# Altium PCB KickerManagerV2.PcbDoc
Units mil, origin at the board's own origin, x right, y up, seen from the top; angles counter-clockwise.
Board outline 1795 x 2325 mil, 2 copper layers (Top Layer, Bottom Layer); 32 components, 24 nets, 105 pads, 13 vias.
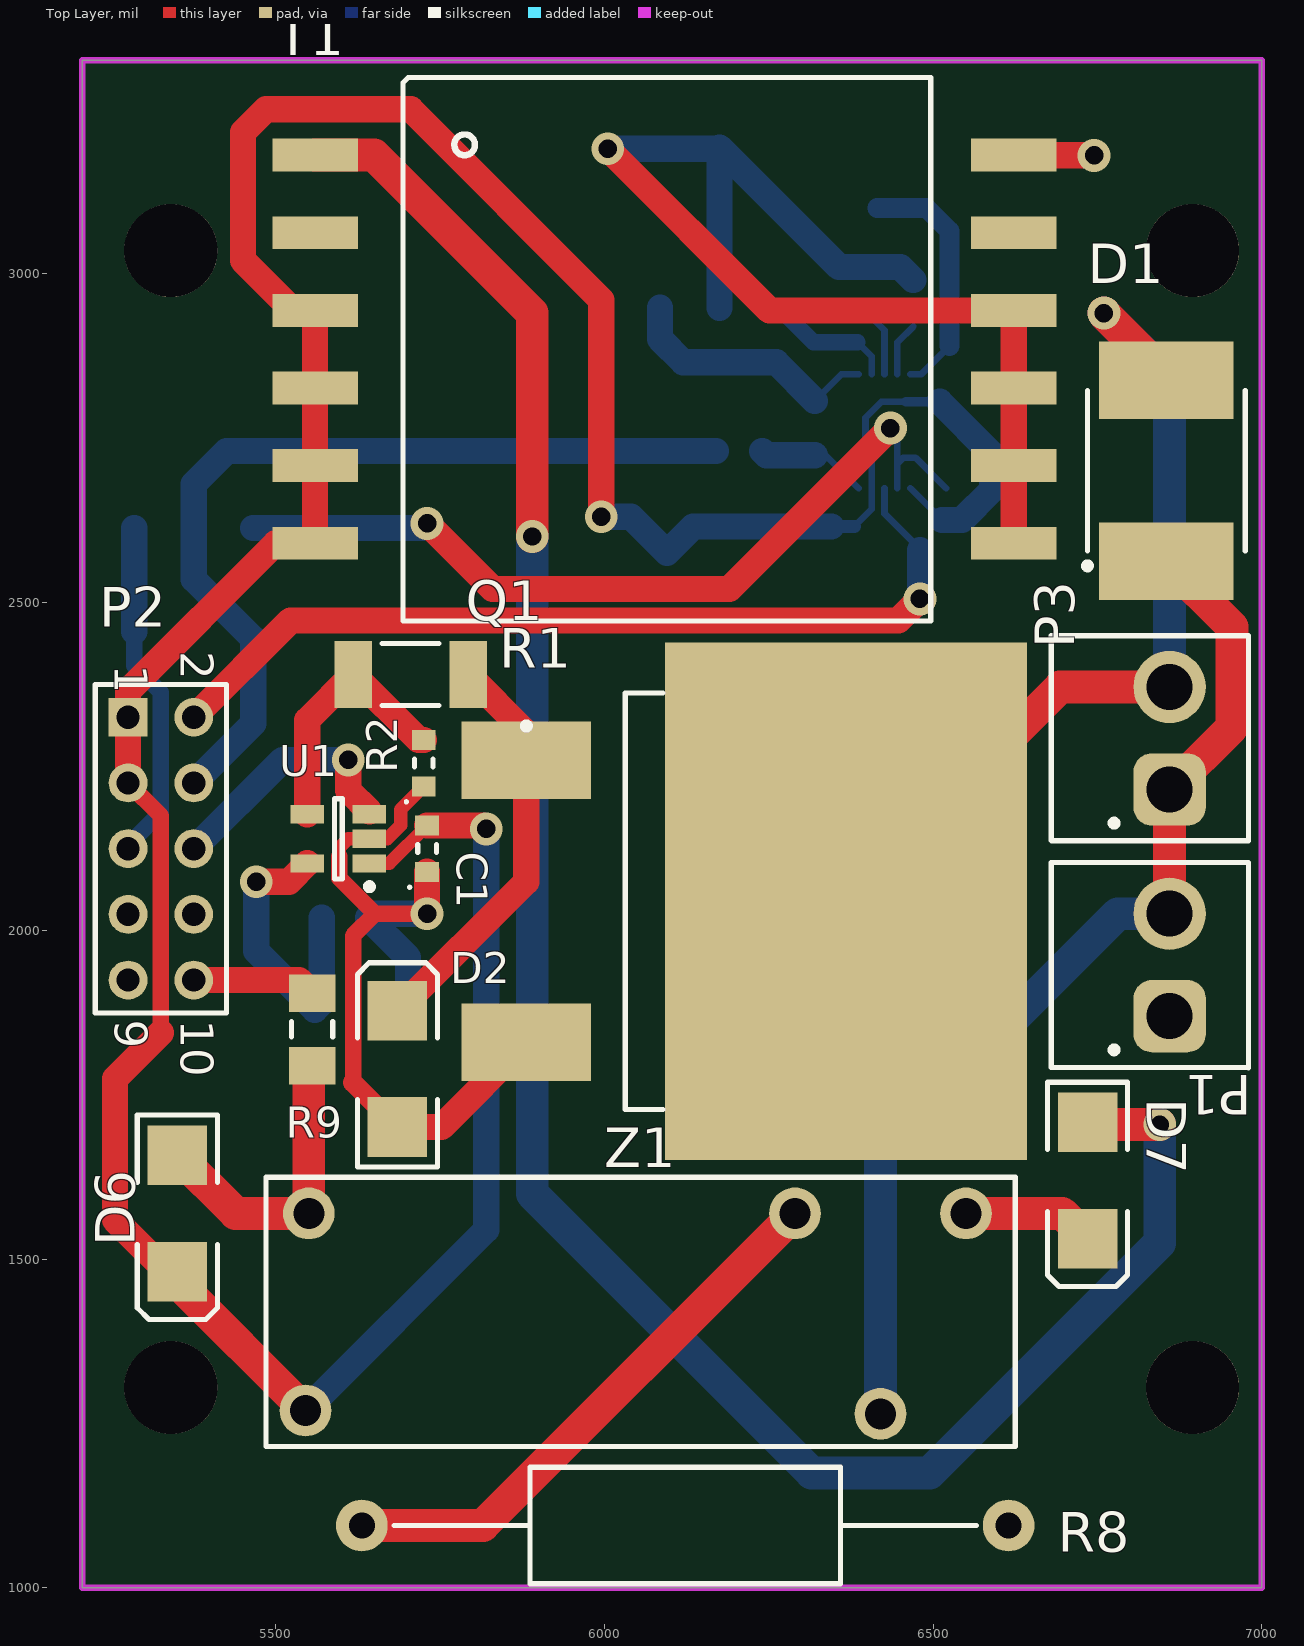
[diagram p0: Top Layer view]
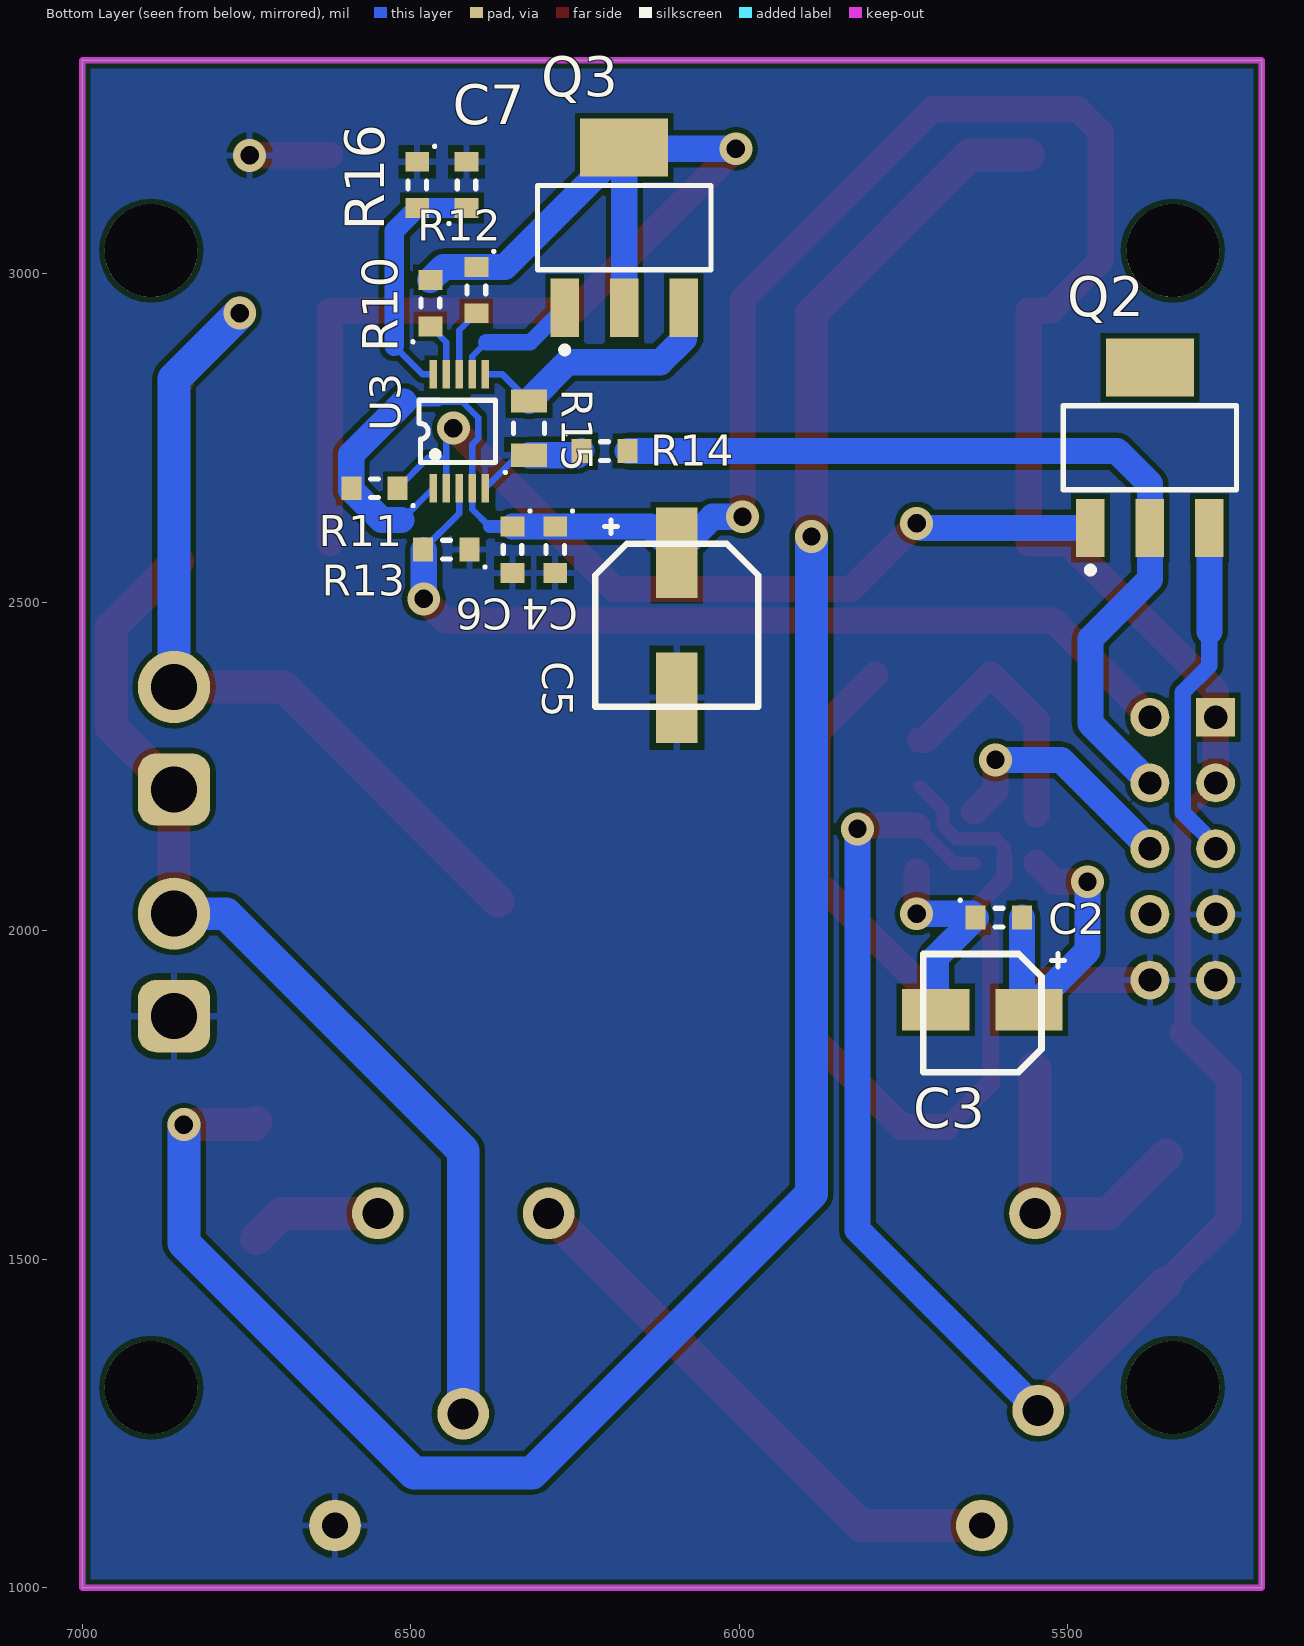
[diagram p1: Bottom Layer view, seen from below]
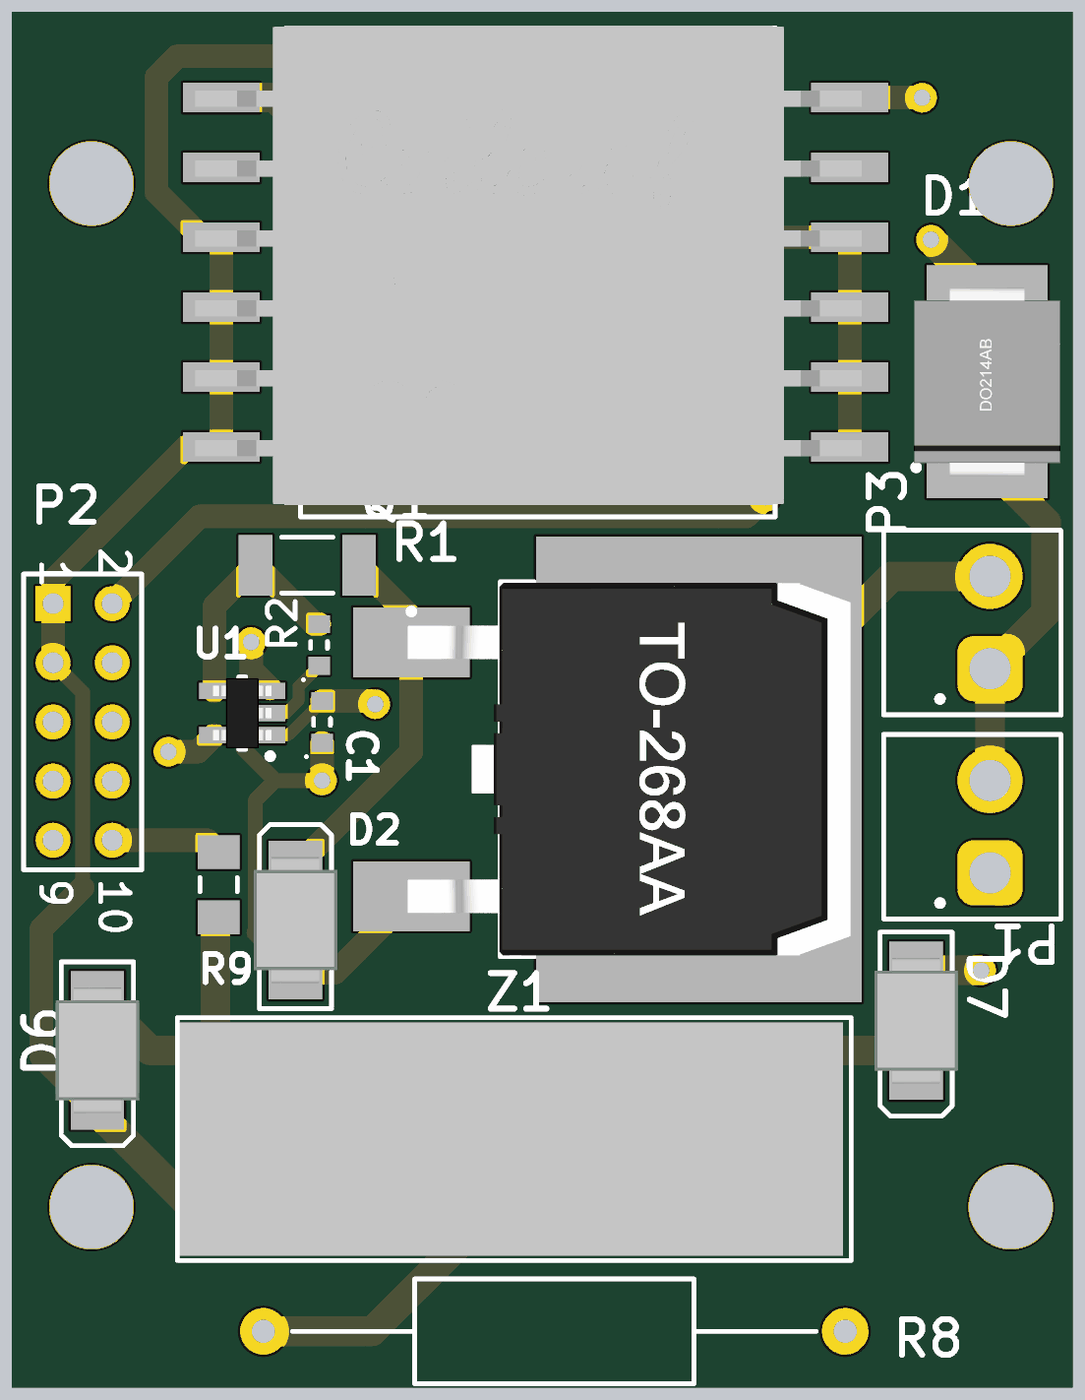
[diagram p2: 3D render of the assembled board from above, using the file's embedded part models]

## Layer stack, top to bottom
Top Solder: solder mask 0.4, Solder Resist, Dk 3.5
Top Layer: signal copper 1.4
Dielectric 1: dielectric 12.6, FR-4, Dk 4.8
Bottom Layer: signal copper 1.4
Bottom Solder: solder mask 0.4, Solder Resist, Dk 3.5

## Board outline
5205,1000 7000,1000 7000,3325 5205,3325

## Design rules (kind name [scope] priority, off if disabled: settings)
Clearance [All] p1: gap=7.87 ignorepadtopadclearanceinfootprint=FALSE
PolygonConnect [All] p1: connectstyle=Relief reliefconductorwidth=10 reliefentries=4 polygonreliefangle="90 Angle" airgapwidth=10
RoutingVias [All] p1: holewidth=28 width=50 viastyle="Through Hole" minholewidth=28 minwidth=50 maxholewidth=28 maxwidth=50
SolderMaskExpansion [All] p1: expansion=4
Width [All] p1: maxlimit=393.7 minlimit=7.87 preferedwidth=7.87
30 further rules are at their usual default settings.

## Classes and differential pairs
component class PWRBankCharger: C4 C5 C6 C7 D6 D7 Q2 Q3 R8 R9 R10 R11 R12 R13 R14 R15 R16 T1 U3 Z1
component class KickTrigger: C1 C2 C3 D2 Q1 R1 R2 U1
component class KickerManager: D1 P1 P2 P3

## Components (designator, comment, footprint, x,y, rotation, side; value= is the part's Value field where it differs from the comment)
C1 "CL10B104KB8SFNC" 0603 5730,2125 r90 top
C2 "CL10B104KB8SFNC" 0603 5605,2020 r180 bottom
C3 "865230340001" "CAP 4.3x4.3mm" 5630,1880 r180 bottom
C4 "865230340001" 0603 6280,2580 r270 bottom
C5 "865080545010" "CAP 6.6x6.6mm" 6095,2465 r90 bottom
C6 "865080545010" 0603 6345,2580 r270 bottom
C7 "CL10B101KB8NNNC" 0603 6415,3135 r90 bottom
D1 "S10M-TP" HSMC 6855,2700 r90 top
D2 "15V, 3W" SMB 5685,1790 r90 top
D6 "MURS160-13-F" SMB 5350,1570 r270 top
D7 "MURS160-E3/5BT" SMB 6735,1620 r270 top
P1 "Header 2" "0.156mil 2pin header" 6860,1870 r90 top
P2 "Header 5X2" HDR2X5 5275,2325 r270 top
P3 "Header 2" "0.156mil 2pin header" 6860,2215 r90 top
Q1 "IXFT94N30P3" TO-268 6200,2045 r0 top
Q2 "FQT5P10TF" SOT-223 5375,2735 r180 bottom
Q3 "PHT6NQ10T,135" SOT-223 6175,3070 r180 bottom
R1 "RMCP2010FT10R0" 2010 5705,2390 r0 top
R2 "RC0603JR-0710KL" 0603 5725,2255 r90 top
R8 "RWM04103901JR15E1" RWM4x10 6615,1095 r180 top
R9 "CRCW1206143RFKEA" 1206 5555,1850 r90 top
R10 "RC0603FR-0760K4L" 0603 6470,2955 r90 bottom
R11 "RC0603JR-07100KL" 0603 6555,2673.39 r0 bottom
R12 "RC0603JR-0743KL" 0603 6400,2975 r270 bottom
R13 "RC0603JR-07100KL" 0603 6445.75,2580 r0 bottom
R14 "RC0603JR-071KL" 0603 6205,2730 r180 bottom
R15 "RL1220T-R012-J" 0805 6320,2765 r90 bottom
R16 "RC0603FR-072K49L" 0603 6490,3135 r270 bottom
T1 "DA2034-al" da2034 6095,2885 r270 top
U1 "TPS2819DBVR" SOT-23-5 5595,2140 r180 top
U3 "LT3750EMS#PBF" MSOP-10 6430,2760 r180 bottom
Z1 "G6RL-1 DC12" G6RL 5155,1325 r180 top

## Footprints (in the part's own frame and the unit in brackets; to place one, negate y for a bottom-side part, rotate by r counter-clockwise, add the part's x,y. Pads: shape width x height; smd on the part's side, far side on the other; paste and mask are expansions set on the pad)
"0.156mil 2pin header" [mil]
  rrect50% 110x110 hole 70: 1(0,0)
  round 110 hole 70: 2(156,0)
  silkscreen extent -78,-120 234,180, body extent -78,-120 234,181, height 425
0603 [mm] "Chip 2-Leads, Body 1,60x0,80mm, IPC Medium Density"
  rect 0.77x0.92 smd: 1(-0.895,0) 2(0.895,0)
  silkscreen extent -1.54,-0.36 0.15,0.72, body extent -0.8,-0.4 0.8,0.4, height 1
0805 [mm] "Chip Capacitor, 2-Leads, Body 2,00x1,25mm, IPC Medium Density"
  rect 0.9x1.4 smd: 1(-1.05,0) 2(1.05,0)
  silkscreen extent -1.76,-0.6 0.2,0.96, body extent -1,-0.63 1,0.63, height 0.8
1206 [mm] "Chip Resistor, 2-Leads, Body 3,20x1,58mm, IPC Medium Density"
  rect 1.45x1.8 smd: 1(-1.4,0) 2(1.4,0)
  silkscreen extent -0.3,-0.8 0.3,0.8, body extent -1.7,-0.89 1.7,0.89, height 0.85
2010 [mm] "Chip Resistor, 2-Leads, Body 5,00x2,45mm, IPC Medium Density"
  rect 1.45x2.6 smd: 1(-2.225,0) 2(2.225,0)
  silkscreen extent -1.1,-1.2 1.1,1.2, body extent -2.6,-1.3 2.6,1.3, height 0.6
"CAP 4.3x4.3mm" [mm] "Chip"
  rect 2.6x1.6 smd: 1(1.8,0) 2(-1.8,0)
  silkscreen extent -2.29,-2.41 3.18,2.16, body extent -2.29,-2.28 2.31,2.02, height 3.91
"CAP 6.6x6.6mm" [mm] "Chip"
  rect 3.5x1.6 smd: 1(2.8,0) 2(-2.8,0)
  silkscreen extent -3.15,-3.15 4.06,3.15, body extent -3.15,-3.15 3.15,3.15, height 7.7
da2034 [mm] "Coilcraft Da2034-al"
  rect 1.27x3.3 smd: 1(-7.5,-13.6) 2(-4.5,-13.6) 3(-1.5,-13.6) 4(1.5,-13.6) 5(4.5,-13.6) 6(7.5,-13.6) 7(7.5,13.4) 8(4.5,13.4) 9(1.5,13.4) 10(-1.5,13.4) 11(-4.5,13.4) 12(-7.5,13.4)
  silkscreen extent -10.5,-10.2 10.5,10.2, body extent -10.58,-14.72 9.99,13.93, height 11.68
G6RL [mm] "Omron SPDT relay"
  round 2 hole 1.2: 1(-9.906,1.397) 2(-32.131,1.524) 3(-35.433,-6.223) 4(-28.829,-6.223) 5(-10.033,-6.223)
  silkscreen extent -37.34,-7.62 -8.38,2.79, body extent -36.98,-7.41 -8.48,2.59, height 12.3
HDR2X5 [mm] "Connector; Header; 5x2 Position"
  rect 1.5x1.5 hole 0.9: 1(0,0)
  round 1.5 hole 0.9: 2(0,2.54) 3(2.54,0) 4(2.54,2.54) 5(5.08,0) 6(5.08,2.54) 7(7.62,0) 8(7.62,2.54) 9(10.16,0) 10(10.16,2.54)
  silkscreen extent -1.27,-1.27 11.43,3.81
HSMC [mm]
  rect 3x5.2 smd: A(3.5,0) K(-3.5,0)
  silkscreen extent -3.8,-3.05 3.1,3.17, body extent -4.06,-3.15 4.06,3.15, height 1.27
MSOP-10 [mm] "Shrink Small Outline, MSOP; 10 Leads; Body Width 3 mm; Pitch 0.5 mm"
  rect 0.29x1.1 smd: 1(-0.9,-2.2) 2(-0.4,-2.2) 3(0.1,-2.2) 4(0.6,-2.2) 5(1.1,-2.2) 6(1.1,2.2) 7(0.6,2.2) 8(0.1,2.2) 9(-0.4,2.2) 10(-0.9,2.2)
  silkscreen extent -1.45,-1.2 1.5,1.2, body extent -1.4,-2.45 1.6,2.45, height 1.15
RWM4x10 [mm]
  round 2 hole 1: 1(0,0) 2(25,0)
  silkscreen extent 1.25,-2.25 23.75,2.25, body extent -0.4,-2.25 25.4,2.24, height 4.5
SMB [mm] "DO-214-AA/SMB; 2 C-Bend Leads; Body 5.3 x 3.6 mm, inc. leads (LxW)"
  rect 2.3x2.3 smd: A(-2.25,0) K(2.25,0)
  silkscreen extent -3.8,-1.55 4.1,1.55, body extent -2.7,-1.8 2.7,1.8, height 2.5
SOT-23-5 [mm]
  rect 1.3x0.7 smd: 1(-1.2,0.95) 2(-1.2,0) 3(-1.2,-0.95) 4(1.2,-0.95) 5(1.2,0.95)
  silkscreen extent -1.33,-1.55 0.15,1.97, body extent -1.25,-1.5 1.25,1.5, height 1.05
SOT-223 [mm] "SOT-223/SC-73; 4 Leads; Body 6.7 x 7.3 mm, inc. leads (LxW max)"
  rect 1.1x2.25 smd: 1(-2.3,-3.1) 2(0,-3.1) 3(2.3,-3.1)
  rect 3.4x2.25 smd: 4(0,3.1)
  silkscreen extent -3.35,-4.85 3.35,1.63, body extent -3.25,-3.37 3.25,3.63, height 1.39
TO-268 [mm]
  rect 5x3 smd: 1(-8.1,5.45) 3(-8.1,-5.45)
  rect 14x20 smd: 2(4.25,0)
  silkscreen extent -8.22,-8.05 -2.83,8.05, body extent -8.27,-8 10.78,8, height 5.1

## Part data
C1 C2: "CAP CER 0.1UF 50V X7R 0603", Capacitance=0.10µF, Manufacturer="Samsung Electro-Mechanics America, Inc.", Operating Temperature="-55°C ~ 125°C", Package / Case="0603 (1608 Metric)", Ratings=-, Supplier Part Number 1=1276-1936-1-ND, Temperature Coefficient=X7R, Tolerance=±10%, Voltage - Rated=50V, Applications="Boardflex Sensitive", Category=Capacitors, ComponentLink1Description=http://www.samsungsem.com/kr/support/product-search/mlcc/CL10B104KB8SFNC.jsp, ComponentLink1URL=http://www.samsungsem.com/kr/support/product-search/mlcc/CL10B104KB8SFNC.jsp, Features="Soft Termination", Height - Seated (Max)=-, Lead Spacing=-, Lead Style=-, Manufacturer Part Number=CL10B104KB8SFNC, Mounting Type="Surface Mount, MLCC", Packaging="Cut Tape (CT)", Pricing 1="1=0.14, 10=0.028, 25=0.0204, 50=0.0156, 100=0.0127, 250=0.01064, 500=0.00908, 1000=0.00712 (CAD)", RoHS="RoHS Compliant", Size / Dimension="0.063\" L x 0.031\" W (1.60mm x 0.80mm)", Stock 1=2612665, Supplier 1=Digi-Key, Thickness (Max)="0.035\" (0.90mm)"
C3 C4: "CAP 10 UF 20% 16 V", Capacitance=10µF, ESR (Equivalent Series Resistance)=-, Lifetime @ Temp.="5000 Hrs @ 105°C", Manufacturer="Wurth Electronics Inc", Operating Temperature="-40°C ~ 105°C", Package / Case="Radial, Can - SMD", Ripple Current="17mA @ 100kHz", Supplier Part Number 1=732-8250-1-ND, Tolerance=±20%, Voltage Rating=16V, Applications="General Purpose", Category=Capacitors, ComponentLink1Description=http://katalog.we-online.de/pbs/datasheet/865230340001.pdf, ComponentLink1URL=http://katalog.we-online.de/pbs/datasheet/865230340001.pdf, Height - Seated (Max)="0.217\" (5.50mm)", Impedance=-, Lead Spacing=-, Manufacturer Part Number=865230340001, Mounting Type="Surface Mount", Packaging="Cut Tape (CT)", Polarization=Polar, Pricing 1="1=0.27, 50=0.2274, 100=0.1981, 250=0.17608, 500=0.15406, 1000=0.14673 (CAD)", RoHS="RoHS Compliant", Size / Dimension="0.157\" Dia (4.00mm)", Stock 1=1549, Supplier 1=Digi-Key, Surface Mount Land Size="0.169\" L x 0.169\" W (4.30mm x 4.30mm)"
C5 C6: "CAP 56 UF 20% 35 V", Capacitance=56µF, ESR (Equivalent Series Resistance)=-, Lifetime @ Temp.="2000 Hrs @ 105°C", Manufacturer="Wurth Electronics Inc", Operating Temperature="-55°C ~ 105°C", Package / Case="Radial, Can - SMD", Ripple Current="250mA @ 100kHz", Supplier Part Number 1=732-8509-1-ND, Tolerance=±20%, Voltage Rating=35V, Applications="General Purpose", Category=Capacitors, ComponentLink1Description=http://katalog.we-online.de/pbs/datasheet/865080545010.pdf, ComponentLink1URL=http://katalog.we-online.de/pbs/datasheet/865080545010.pdf, Height - Seated (Max)="0.303\" (7.70mm)", Impedance="490 mOhm", Lead Spacing=-, Manufacturer Part Number=865080545010, Mounting Type="Surface Mount", Packaging="Cut Tape (CT)", Polarization=Polar, Pricing 1="1=0.47, 50=0.3966, 100=0.3455, 250=0.30712 (CAD)", RoHS="RoHS Compliant", Size / Dimension="0.248\" Dia (6.30mm)", Stock 1=733, Supplier 1=Digi-Key, Surface Mount Land Size="0.260\" L x 0.260\" W (6.60mm x 6.60mm)"
C7: "CAP CER 100PF 50V X7R 0603", Capacitance=100pF, Manufacturer="Samsung Electro-Mechanics America, Inc.", Operating Temperature="-55°C ~ 125°C", Package / Case="0603 (1608 Metric)", Ratings=-, Supplier Part Number 1=1276-1909-1-ND, Temperature Coefficient=X7R, Tolerance=±10%, Voltage - Rated=50V, Applications="General Purpose", Category=Capacitors, ComponentLink1Description=http://www.samsungsem.com/kr/support/product-search/mlcc/CL10B101KB8NNNC.jsp, ComponentLink1URL=http://www.samsungsem.com/kr/support/product-search/mlcc/CL10B101KB8NNNC.jsp, Features=-, Height - Seated (Max)=-, Lead Spacing=-, Lead Style=-, Manufacturer Part Number=CL10B101KB8NNNC, Mounting Type="Surface Mount, MLCC", Packaging="Cut Tape (CT)", Pricing 1="1=0.14, 10=0.017, 25=0.0124, 50=0.009, 100=0.0075, 250=0.00632, 500=0.00538, 1000=0.00422 (CAD)", RoHS="RoHS Compliant", Size / Dimension="0.063\" L x 0.031\" W (1.60mm x 0.80mm)", Stock 1=68227, Supplier 1=Digi-Key, Thickness (Max)="0.035\" (0.90mm)"
D1: "DIODE GEN PURP 1KV 10A DO214AB", Capacitance @ Vr, F=-, Current - Average Rectified (Io)=10A, Current - Reverse Leakage @ Vr="10µA @ 1000V", Manufacturer="Micro Commercial Co", Operating Temperature - Junction="-55°C ~ 150°C", Package / Case="DO-214AB, SMC", Supplier Device Package="DO-214AB, (SMC)", Supplier Part Number 1=S10M-TPMSCT-ND, Voltage - DC Reverse (Vr) (Max)="1000V (1kV)", Voltage - Forward (Vf) (Max) @ If="1.2V @ 10A", Category="Discrete Semiconductor Products", ComponentLink1Description=http://www.mccsemi.com/up_pdf/S10A~S10M(HSMC).PDF, ComponentLink1URL=http://www.mccsemi.com/up_pdf/S10A~S10M(HSMC).PDF, Diode Type=Standard, Manufacturer Part Number=S10M-TP, Mounting Type="Surface Mount", Packaging="Cut Tape (CT)", Part Status=Active, Pricing 1="1=0.96, 10=0.835, 25=0.7392, 100=0.6438, 250=0.5604, 500=0.47694 (CAD)", RoHS="RoHS Compliant", Speed="Standard Recovery >500ns, > 200mA (Io)", Stock 1=16490, Supplier 1=Digi-Key
D2: library part 3SMBJ5929B-TP, "DIODE ZENER 15V 3W DO214AA", Current - Reverse Leakage @ Vr="1µA @ 11.4V", Manufacturer="Micro Commercial Co", Operating Temperature="-55°C ~ 150°C", Package / Case="DO-214AA, SMB", Power - Max=3W, Supplier Device Package="DO-214AA (SMB)", Supplier Part Number 1=3SMBJ5929BTPMSCT-ND, Tolerance=±5%, Voltage - Forward (Vf) (Max) @ If="1.5V @ 200mA", Category="Discrete Semiconductor Products", ComponentLink1Description=http://www.mccsemi.com/up_pdf/3SMBJ5913B~3SMBJ5943B(DO-214AA).pdf, ComponentLink1URL=http://www.mccsemi.com/up_pdf/3SMBJ5913B~3SMBJ5943B(DO-214AA).pdf, Manufacturer Part Number=3SMBJ5929B-TP, Mounting Type="Surface Mount", Packaging="Cut Tape (CT)", Part Status=Active, Pricing 1="1=0.65, 10=0.545, 25=0.4768, 100=0.4088, 250=0.35432, 500=0.29978, 1000=0.23164 (CAD)", RoHS="RoHS Compliant", Stock 1=8457, Supplier 1=Digi-Key
D6: "DIODE GEN PURP 600V 1A SMB", Capacitance @ Vr, F="10pF @ 4V, 1MHz", Current - Average Rectified (Io)=1A, Current - Reverse Leakage @ Vr="5µA @ 600V", Manufacturer="Diodes Incorporated", Operating Temperature - Junction="-55°C ~ 175°C", Package / Case="DO-214AA, SMB", Supplier Device Package=SMB, Supplier Part Number 1=MURS160-FDICT-ND, Voltage - DC Reverse (Vr) (Max)=600V, Voltage - Forward (Vf) (Max) @ If="1.25V @ 1A", Category="Discrete Semiconductor Products", ComponentLink1Description=http://www.diodes.com/_files/datasheets/ds30130.pdf, ComponentLink1URL=http://www.diodes.com/_files/datasheets/ds30130.pdf, Diode Type=Standard, Manufacturer Part Number=MURS160-13-F, Mounting Type="Surface Mount", Packaging="Cut Tape (CT)", Part Status=Active, Pricing 1="1=0.55, 10=0.445, 100=0.303, 500=0.2268, 1000=0.16986 (CAD)", Reverse Recovery Time (trr)=50ns, RoHS="RoHS Compliant", Speed="Fast Recovery =< 500ns, > 200mA (Io)", Stock 1=18621, Supplier 1=Digi-Key
D7: "DIODE GEN PURP 600V 2A DO214AA", Capacitance @ Vr, F=-, Current - Average Rectified (Io)=2A, Current - Reverse Leakage @ Vr="5µA @ 600V", Manufacturer="Vishay Semiconductor Diodes Division", Operating Temperature - Junction="-65°C ~ 175°C", Package / Case="DO-214AA, SMB", Supplier Device Package="DO-214AA (SMB)", Voltage - DC Reverse (Vr) (Max)=600V, Voltage - Forward (Vf) (Max) @ If="1.25V @ 1A", Category="Discrete Semiconductor Products", ComponentLink1Description=http://www.vishay.com/docs/88688/murs140.pdf, ComponentLink1URL=http://www.vishay.com/docs/88688/murs140.pdf, Diode Type=Standard, Manufacturer Part Number=MURS160-E3/5BT, Mounting Type="Surface Mount", Packaging="Cut Tape (CT)", Part Status=Active, Pricing 1="1=0.55, 10=0.442, 25=0.4044, 100=0.3011, 250=0.27296, 500=0.22592, 1000=0.16943 (CAD)", Reverse Recovery Time (trr)=75ns, RoHS="RoHS Compliant", Speed="Fast Recovery =< 500ns, > 200mA (Io)", Stock 1=4853, Supplier 1=Digi-Key
P1 P3: library part "Header 2pin 0.156", "Header, 2-Pin, 0.156mil"
P2: "Header, 5-Pin, Dual row", LatestRevisionDate=17-Jul-2002, LatestRevisionNote="Re-released for DXP Platform.", Publisher="Altium Limited"
Q1: "MOSFET N-CH 300V 94A TO-268", Current - Continuous Drain (Id) @ 25°C="94A (Tc)", Drain to Source Voltage (Vdss)=300V, Drive Voltage (Max Rds On,  Min Rds On)=10V, Input Capacitance (Ciss) (Max) @ Vds="5510pF @ 25V", Manufacturer=IXYS, Operating Temperature="-55°C ~ 150°C (TJ)", Package / Case="TO-268-3, D³Pak (2 Leads + Tab), TO-268AA", Power Dissipation (Max)="1040W (Tc)", Supplier Device Package=TO-268, Supplier Part Number 1=IXFT94N30P3-ND, Category="Discrete Semiconductor Products", ComponentLink1Description=http://ixapps.ixys.com/DataSheet/DS100479A(IXFH-FT-FQ94N30P3).pdf, ComponentLink1URL=http://ixapps.ixys.com/DataSheet/DS100479A(IXFH-FT-FQ94N30P3).pdf, FET Feature=-, FET Type=N-Channel, Gate Charge (Qg) (Max) @ Vgs="102nC @ 10V", Manufacturer Part Number=IXFT94N30P3, Mounting Type="Surface Mount", Packaging=Tube, Part Status=Active, Pricing 1="1=16.71, 10=15.037, 25=13.7004, 100=12.3635, 250=11.36108, 500=10.35866 (CAD)", Rds On (Max) @ Id, Vgs="36 mOhm @ 47A, 10V", RoHS="RoHS Compliant", Stock 1=1, Supplier 1=Digi-Key, Technology="MOSFET (Metal Oxide)", Vgs (Max)=±20V, Vgs(th) (Max) @ Id="5V @ 4mA"
Q2: "MOSFET P-CH 100V 1A SOT-223", Current - Continuous Drain (Id) @ 25°C="1A (Tc)", Drain to Source Voltage (Vdss)=100V, Input Capacitance (Ciss) @ Vds="250pF @ 25V", Manufacturer="Fairchild Semiconductor", Operating Temperature="-55°C ~ 150°C (TJ)", Package / Case="TO-261-4, TO-261AA", Power - Max=2W, Supplier Device Package=SOT-223-4, Supplier Part Number 1=FQT5P10TFCT-ND, Category="Discrete Semiconductor Products", ComponentLink1Description=http://www.fairchildsemi.com/datasheets/FQ/FQT5P10.pdf, ComponentLink1URL=http://www.fairchildsemi.com/datasheets/FQ/FQT5P10.pdf, FET Feature=Standard, FET Type="MOSFET P-Channel, Metal Oxide", Gate Charge (Qg) @ Vgs="8.2nC @ 10V", Manufacturer Part Number=FQT5P10TF, Mounting Type="Surface Mount", Packaging="Cut Tape (CT)", Part Status=Active, Pricing 1="1=0.86, 10=0.737, 100=0.5503, 500=0.43224, 1000=0.33321 (CAD)", Rds On (Max) @ Id, Vgs="1.05 Ohm @ 500mA, 10V", RoHS="RoHS Compliant", Stock 1=526, Supplier 1=Digi-Key, Vgs(th) (Max) @ Id="4V @ 250µA"
Q3: "MOSFET N-CH 100V 3A SOT223", Current - Continuous Drain (Id) @ 25°C="3A (Ta)", Drain to Source Voltage (Vdss)=100V, Input Capacitance (Ciss) @ Vds="633pF @ 25V", Manufacturer="NXP Semiconductors", Operating Temperature="-65°C ~ 150°C (TJ)", Package / Case="TO-261-4, TO-261AA", Power - Max=1.8W, Supplier Device Package=SC-73, Supplier Part Number 1=568-6791-1-ND, Category="Discrete Semiconductor Products", ComponentLink1Description=http://www.nxp.com/documents/data_sheet/PHT6NQ10T.pdf, ComponentLink1URL=http://www.nxp.com/documents/data_sheet/PHT6NQ10T.pdf, FET Feature=Standard, FET Type="MOSFET N-Channel, Metal Oxide", Gate Charge (Qg) @ Vgs="21nC @ 10V", Manufacturer Part Number=PHT6NQ10T,135, Mounting Type="Surface Mount", Packaging="Cut Tape (CT)", Part Status=Active, Pricing 1="1=1.38, 10=1.242, 100=0.9684, 500=0.80092, 1000=0.6334 (CAD)", Rds On (Max) @ Id, Vgs="90 mOhm @ 3A, 10V", RoHS="RoHS Compliant", Stock 1=9189, Supplier 1=Digi-Key, Vgs(th) (Max) @ Id="4V @ 1mA"
R1: "RES SMD 10 OHM 1% 1W 2010", Manufacturer="Stackpole Electronics Inc.", Operating Temperature="-55°C ~ 155°C", Package / Case="2010 (5025 Metric)", Power (Watts)=1W, Resistance (Ohms)=10, Supplier Device Package=2010, Supplier Part Number 1=RMCP2010FT10R0CT-ND, Temperature Coefficient=±100ppm/°C, Tolerance=±1%, Category=Resistors, ComponentLink1Description=https://www.seielect.com/Catalog/SEI-RMCF_RMCP.pdf, ComponentLink1URL=https://www.seielect.com/Catalog/SEI-RMCF_RMCP.pdf, Composition="Thick Film", Failure Rate=-, Features="Automotive AEC-Q200", Height - Seated (Max)="0.028\" (0.70mm)", Manufacturer Part Number=RMCP2010FT10R0, Packaging="Cut Tape (CT)", Part Status=Active, Pricing 1="1=0.76, 10=0.585, 100=0.2462, 1000=0.13582 (CAD)", RoHS="RoHS Compliant", Size / Dimension="0.197\" L x 0.098\" W (5.00mm x 2.50mm)", Stock 1=13664, Supplier 1=Digi-Key
R2: "RES SMD 10K OHM 5% 1/10W 0603", Manufacturer=Yageo, Operating Temperature="-55°C ~ 155°C", Package / Case="0603 (1608 Metric)", Power (Watts)="0.1W, 1/10W", Resistance (Ohms)=10k, Supplier Device Package=0603, Supplier Part Number 1=311-10KGRCT-ND, Temperature Coefficient=±100ppm/°C, Tolerance=±5%, Category=Resistors, ComponentLink1Description=http://www.yageo.com/documents/recent/PYu-RC_Group_51_RoHS_L_04.pdf, ComponentLink1URL=http://www.yageo.com/documents/recent/PYu-RC_Group_51_RoHS_L_04.pdf, Composition="Thick Film", Features="Moisture Resistant", Height="0.022\" (0.55mm)", Manufacturer Part Number=RC0603JR-0710KL, Number of Terminations=2, Packaging="Cut Tape (CT)", Pricing 1="1=0.15, 10=0.017, 25=0.012, 100=0.0067, 250=0.00508, 500=0.00408, 1000=0.003, 2500=0.0026 (CAD)", RoHS="RoHS Compliant", Size / Dimension="0.063\" L x 0.031\" W (1.60mm x 0.80mm)", Stock 1=5547866, Supplier 1=Digi-Key
R8: "RES WIREWOUND 3.9K OHM 3W", Manufacturer="Vishay Sfernice", Operating Temperature="-55°C ~ 350°C", Package / Case=Axial, Power (Watts)=3W, Resistance (Ohms)=3.9k, Supplier Part Number 1=RWMA-3.9KCT-ND, Temperature Coefficient=±75ppm/°C, Tolerance=±5%, Category=Resistors, ComponentLink1Description=http://www.vishay.com/docs/50008/rwm.pdf, ComponentLink1URL=http://www.vishay.com/docs/50008/rwm.pdf, Composition=Wirewound, Failure Rate=-, Features="Flame Proof, Safety", Height=-, Manufacturer Part Number=RWM04103901JR15E1, Number of Terminations=2, Packaging="Cut Tape (CT)", Part Status=Discontinued, Pricing 1="1=1.64, 10=1.455, 25=1.3372, 50=1.2202, 100=1.0559, 250=0.8916, 500=0.75078 (CAD)", RoHS="RoHS Compliant", Size / Dimension="0.217\" Dia x 0.472\" L (5.50mm x 12.00mm)", Stock 1=947, Supplier 1=Digi-Key, Supplier Device Package=Axial
R9: "RES SMD 143 OHM 1% 1/4W 1206", Manufacturer="Vishay Dale", Operating Temperature="-55°C ~ 155°C", Package / Case="1206 (3216 Metric)", Power (Watts)="0.25W, 1/4W", Resistance (Ohms)=143, Supplier Device Package=1206, Supplier Part Number 1=541-143FCT-ND, Temperature Coefficient=±100ppm/°C, Tolerance=±1%, Category=Resistors, ComponentLink1Description=http://www.vishay.com/docs/20035/dcrcwe3.pdf, ComponentLink1URL=http://www.vishay.com/docs/20035/dcrcwe3.pdf, Composition="Thick Film", Failure Rate=-, Features="Automotive AEC-Q200", Height="0.024\" (0.60mm)", Manufacturer Part Number=CRCW1206143RFKEA, Number of Terminations=2, Packaging="Cut Tape (CT)", Part Status=Active, Pricing 1="1=0.15, 10=0.081, 25=0.0588, 50=0.0452, 100=0.0332, 250=0.02532, 500=0.02024, 1000=0.01491, 2500=0.01294 (CAD)", RoHS="RoHS Compliant", Size / Dimension="0.126\" L x 0.063\" W (3.20mm x 1.60mm)", Stock 1=11861, Supplier 1=Digi-Key
R10: "RES SMD 42.2K OHM 1% 1/10W 0603", Manufacturer=Yageo, Operating Temperature="-55°C ~ 155°C", Package / Case="0603 (1608 Metric)", Power (Watts)="0.1W, 1/10W", Resistance (Ohms)=42.2k, Supplier Device Package=0603, Supplier Part Number 1=311-42.2KHRDKR-ND, Temperature Coefficient=±100ppm/°C, Tolerance=±1%, Category=Resistors, ComponentLink1Description=https://www.digikey.ca/product-detail/en/yageo/RC0603FR-0742K2L/311-42.2KHRCT-ND/730176, ComponentLink1URL=https://www.digikey.ca/product-detail/en/yageo/RC0603FR-0742K2L/311-42.2KHRCT-ND/730176, Composition="Thick Film", Features="Moisture Resistant", Height="0.022\" (0.55mm)", Manufacturer Part Number=RC0603FR-0760K4L, Number of Terminations=2, Packaging="Cut Tape (CT)", RoHS="RoHS Compliant", Size / Dimension="0.063\" L x 0.031\" W (1.60mm x 0.80mm)", Supplier 1=Digi-Key
R11 R13: "RES SMD 100K OHM 5% 1/10W 0603", Manufacturer=Yageo, Operating Temperature="-55°C ~ 155°C", Package / Case="0603 (1608 Metric)", Power (Watts)="0.1W, 1/10W", Resistance (Ohms)=100k, Supplier Device Package=0603, Supplier Part Number 1=311-100KGRCT-ND, Temperature Coefficient=±100ppm/°C, Tolerance=±5%, Category=Resistors, ComponentLink1Description=http://www.yageo.com/documents/recent/PYu-RC_Group_51_RoHS_L_04.pdf, ComponentLink1URL=http://www.yageo.com/documents/recent/PYu-RC_Group_51_RoHS_L_04.pdf, Composition="Thick Film", Features="Moisture Resistant", Height="0.022\" (0.55mm)", Manufacturer Part Number=RC0603JR-07100KL, Number of Terminations=2, Packaging="Cut Tape (CT)", Pricing 1="1=0.15, 10=0.017, 25=0.012, 100=0.0067, 250=0.00508, 500=0.00408, 1000=0.003, 2500=0.0026 (CAD)", RoHS="RoHS Compliant", Size / Dimension="0.063\" L x 0.031\" W (1.60mm x 0.80mm)", Stock 1=2803334, Supplier 1=Digi-Key
R12: "RES SMD 43K OHM 5% 1/10W 0603", Manufacturer=Yageo, Operating Temperature="-55°C ~ 155°C", Package / Case="0603 (1608 Metric)", Power (Watts)="0.1W, 1/10W", Resistance (Ohms)=43k, Supplier Device Package=0603, Supplier Part Number 1=311-43KGRCT-ND, Temperature Coefficient=±100ppm/°C, Tolerance=±5%, Category=Resistors, ComponentLink1Description=http://www.yageo.com/documents/recent/PYu-RC_Group_51_RoHS_L_04.pdf, ComponentLink1URL=http://www.yageo.com/documents/recent/PYu-RC_Group_51_RoHS_L_04.pdf, Composition="Thick Film", Features="Moisture Resistant", Height="0.022\" (0.55mm)", Manufacturer Part Number=RC0603JR-0743KL, Number of Terminations=2, Packaging="Cut Tape (CT)", Pricing 1="1=0.15, 10=0.017, 25=0.012, 100=0.0067, 250=0.00508, 500=0.00408, 1000=0.003, 2500=0.0026 (CAD)", RoHS="RoHS Compliant", Size / Dimension="0.063\" L x 0.031\" W (1.60mm x 0.80mm)", Stock 1=85147, Supplier 1=Digi-Key
R14: "RES SMD 1K OHM 5% 1/10W 0603", Manufacturer=Yageo, Operating Temperature="-55°C ~ 155°C", Package / Case="0603 (1608 Metric)", Power (Watts)="0.1W, 1/10W", Resistance (Ohms)=1k, Supplier Device Package=0603, Supplier Part Number 1=311-1.0KGRCT-ND, Temperature Coefficient=±100ppm/°C, Tolerance=±5%, Category=Resistors, ComponentLink1Description=http://www.yageo.com/documents/recent/PYu-RC_Group_51_RoHS_L_04.pdf, ComponentLink1URL=http://www.yageo.com/documents/recent/PYu-RC_Group_51_RoHS_L_04.pdf, Composition="Thick Film", Features="Moisture Resistant", Height="0.022\" (0.55mm)", Manufacturer Part Number=RC0603JR-071KL, Number of Terminations=2, Packaging="Cut Tape (CT)", Pricing 1="1=0.15, 10=0.017, 25=0.012, 100=0.0067, 250=0.00508, 500=0.00408, 1000=0.003, 2500=0.0026 (CAD)", RoHS="RoHS Compliant", Size / Dimension="0.063\" L x 0.031\" W (1.60mm x 0.80mm)", Stock 1=1078221, Supplier 1=Digi-Key
R15: "RES SMD 0.012 OHM 5% 1/4W 0805", Manufacturer=Susumu, Operating Temperature="-55°C ~ 125°C", Package / Case="0805 (2012 Metric)", Power (Watts)="0.25W, 1/4W", Resistance (Ohms)=0.012, Supplier Device Package=0805, Supplier Part Number 1=RL12T.012JCT-ND, Temperature Coefficient="0/ +350ppm/°C", Tolerance=±5%, Category=Resistors, ComponentLink1Description=http://www.susumu.co.jp/common/pdf/n_catalog_partition08_en.pdf, ComponentLink1URL=http://www.susumu.co.jp/common/pdf/n_catalog_partition08_en.pdf, Composition="Thin Film", Failure Rate=-, Features="Current Sense", Height="0.028\" (0.70mm)", Manufacturer Part Number=RL1220T-R012-J, Number of Terminations=2, Packaging="Cut Tape (CT)", Part Status=Active, Pricing 1="1=0.54, 10=0.39, 25=0.288, 50=0.2124, 100=0.1558, 250=0.12876, 500=0.10616, 1000=0.07679 (CAD)", RoHS="RoHS Compliant", Size / Dimension="0.079\" L x 0.049\" W (2.00mm x 1.25mm)", Stock 1=7258, Supplier 1=Digi-Key
R16: "RES SMD 2.49K OHM 1% 1/10W 0603", Manufacturer=Yageo, Operating Temperature="-55°C ~ 155°C", Package / Case="0603 (1608 Metric)", Power (Watts)="0.1W, 1/10W", Resistance (Ohms)=2.49k, Supplier Device Package=0603, Supplier Part Number 1=311-2.49KHRCT-ND, Temperature Coefficient=±100ppm/°C, Tolerance=±1%, Category=Resistors, ComponentLink1Description=http://www.yageo.com/documents/recent/PYu-RC_Group_51_RoHS_L_04.pdf, ComponentLink1URL=http://www.yageo.com/documents/recent/PYu-RC_Group_51_RoHS_L_04.pdf, Composition="Thick Film", Features="Moisture Resistant", Height="0.022\" (0.55mm)", Manufacturer Part Number=RC0603FR-072K49L, Number of Terminations=2, Packaging="Cut Tape (CT)", Pricing 1="1=0.15, 10=0.021, 25=0.0152, 100=0.0086, 250=0.0066, 500=0.00526, 1000=0.00389, 2500=0.00337 (CAD)", RoHS="RoHS Compliant", Size / Dimension="0.063\" L x 0.031\" W (1.60mm x 0.80mm)", Stock 1=319353, Supplier 1=Digi-Key
T1: Supplier Part Number 1=Da2034-al, Supplier 1=Coilcraft
U1: "IC NONINVERT FET DRVR SOT-23-5", Current - Peak Output (Source, Sink)="2A, 2A", Logic Voltage - VIL, VIH="1V, 4V", Manufacturer="Texas Instruments", Operating Temperature="-40°C ~ 125°C (TA)", Package / Case="SC-74A, SOT-753", Supplier Device Package=SOT-23-5, Supplier Part Number 1=296-3374-1-ND, Voltage - Supply="4 V ~ 14 V", Category="Integrated Circuits (ICs)", Channel Type=Single, ComponentLink1Description=http://www.ti.com/lit/ds/symlink/tps2816.pdf, ComponentLink1URL=http://www.ti.com/lit/ds/symlink/tps2816.pdf, Driven Configuration=Low-Side, Gate Type="N-Channel MOSFET", Input Type=Non-Inverting, Manufacturer Part Number=TPS2819DBVR, Mounting Type="Surface Mount", Packaging="Cut Tape (CT)", Part Status=Active, Pricing 1="1=2.99, 10=2.692, 100=2.1635, 500=1.7775, 1000=1.47279 (CAD)", Rise / Fall Time (Typ)="14ns, 14ns", RoHS="RoHS Compliant", Stock 1=8057, Supplier 1=Digi-Key
U3: "IC CONVERTER 10-MSOP", Manufacturer="Linear Technology", Package / Case="10-TFSOP, 10-MSOP (0.118\", 3.00mm Width)", Supplier Device Package=10-MSOP, Applications="Power Supply Controller", Category="Integrated Circuits (ICs)", ComponentLink1Description=http://www.linear.com/docs/10239, ComponentLink1URL=http://www.linear.com/docs/10239, Manufacturer Part Number=LT3750EMS#PBF, Mounting Type="Surface Mount", Packaging=Tube, Part Status=Active, Pricing 1="1=9.94, 25=7.0624, 100=5.8196 (CAD)", RoHS="RoHS Compliant", Stock 1=1621, Supplier 1=Digi-Key, Type="Flyback, Forward Converter"
Z1: "RELAY GEN PURPOSE SPDT 8A 12V", Coil Current=18.3mA, Coil Power="220 mW", Coil Resistance="654 Ohms", Coil Voltage=12VDC, Contact Rating (Current)=8A, Manufacturer="Omron Electronics Inc-EMC Div", Operating Temperature="-40°C ~ 85°C", Supplier Part Number 1=Z2760-ND, Switching Voltage="400VAC, 300VDC - Max", Turn Off Voltage (Min)="1.2 VDC", Turn On Voltage (Max)="8.4 VDC", Category=Relays, Coil Type="Non Latching", ComponentLink1Description=http://www.omron.com/ecb/products/pdf/en-g6rl.pdf, ComponentLink1URL=http://www.omron.com/ecb/products/pdf/en-g6rl.pdf, Contact Form="SPDT (1 Form C)", Contact Material="Silver Nickel (AgNi)", Features="Sealed - Flux Protection", Manufacturer Part Number="G6RL-1 DC12", Mounting Type="Through Hole", Operate Time=10ms, Packaging=Bulk, Part Status=Active, Pricing 1="1=4.79, 10=4.489, 25=3.99, 50=3.7906, 100=3.591, 250=3.19208, 500=2.99256, 1000=2.79306, 5000=2.69331 (CAD)", Relay Type="General Purpose", Release Time=5ms, RoHS="RoHS Compliant", Stock 1=680, Supplier 1=Digi-Key, Termination Style="PC Pin"

## Free pads (board coordinates)
  round 141.73 hole 141.73: 1(5340,1305) 1(5340,3035) 1(6895,1305) 1(6895,3035)

## Via types
v1: diameter 50, hole 28, Top Layer to Bottom Layer, 13 vias

## Nets (pads, with @x,y where several pads share a name; then routed paths per layer and width w, separated by ;. In a path a pad name is that pad's centre, name@x,y a point inside that pad or via, vN(x,y) a via of type N, cw(c..) or ccw(c..) an arc to the next point about the centre after c; other vN are vias at no path point)
5Va: P2.5 Q2.3 | length 520.2
  Bottom Layer w25: P2.5@5275,2130.2 5324.9,2180.1 5324.9,2362.97 5284.45,2403.42 5284.45,2455.55
  Bottom Layer w40: 5284.45,2455.55 Q2.3
AGND: C1.1 C2.1 C3.2 D2.A Q1.3 R2.1 U1.2 | length 1320.8
  Top Layer w20: 5596.28,2113.72 5596.28,2126.28 5610,2140 U1.2 5669.49,2140 5690,2160.51 5690,2184.76 R2.1
  Top Layer w25: 5596.28,2113.72 5596.28,2080.38 5650.66,2026 ; 5617.4,1769.02 5617.4,1992.74 5650.66,2026 ; v1(5730,2026) 5650.66,2026
  Top Layer w30: 5617.4,1769.02 D2.A
  Top Layer w40: D2.A 5752.09,1701.42 Q1.3 ; v1(5730,2026) C1.1
  Bottom Layer w40: C3.2 5700.87,1959.37 C2.1 5646.24,2026 v1(5730,2026)
GATE: D2.K Q1.1 R1.2 | length 629.3
  Top Layer w40: D2.K 5881.1,2074.68 Q1.1 5881.1,2301.5 R1.2
KICK: P2.6 U1.3 | length 382.6
  Top Layer w40: v1(5610,2260) 5610,2213.9 U1.3@5642.24,2181.65
  Bottom Layer w40: P2.6 5510,2260 v1(5610,2260)
NetC7_1: C7.1 R16.2 U3.10 | length 376.8
  Bottom Layer w10: U3.10 6481.61,2846.61 6525,2890
  Bottom Layer w30: C7.1 R16.2 6525,3064.76 6525,2890
NetD1_A: D1.A P3.2 Q1.2 | length 1379.7
  Top Layer w50: Q1.2 6693.32,2371 P3.2 ; v1(6760,2940) 6855,2845 D1.A
  Bottom Layer w50: v1(6760,2940) 6860,2840 P3.2
NetD1_K: D1.K P1.2 P3.1 Z1.2 | length 1606.5
  Top Layer w50: D1.K 6955,2462.2 6955,2310 P3.1 P1.2
  Bottom Layer w50: Z1.2 6420,1665 6781,2026 P1.2
NetD6_1: D6.A R9.1 Z1.5 | length 463.6
  Top Layer w40: R9.1@5550,1789.88 R9.1
  Top Layer w50: D6.A 5438.58,1570 Z1.5 R9.1@5550,1789.88
NetD7_1: D7.A T1.1 | length 3337.5
  Top Layer w50: T1.1 5649.72,3180.28 5890,2940 v1(5890,2600) ; D7.A 6738.58,1705 v1(6845,1705)
  Bottom Layer w50: v1(5890,2600) 5890,1600 6315,1175 6495,1175 6845,1525 v1(6845,1705)
NetD7_2: D7.K Z1.3 | length 201
  Top Layer w50: Z1.3 6696.42,1570 D7.K
NetP2_2: P2.2 R13.2 U3.3 | length 1369.7
  Top Layer w40: P2.2 5522.13,2472.13 6447.13,2472.13 v1(6480,2505)
  Bottom Layer w10: U3.3 6426.06,2634.92 R13.2
  Bottom Layer w40: v1(6480,2505) R13.2@6480,2579.02
NetP2_4: P2.4 Q2.2 R14.2 | length 1345.5
  Bottom Layer w40: P2.4 5465.55,2315.55 5465.55,2444.45 5375,2535 Q2.2 5375,2680 5425,2730 R14.2
NetQ2_1: Q2.1 R11.1 U3.2 | length 1308.5
  Top Layer w40: v1(5730,2620) 5830,2520 6190,2520 v1(6435,2765)
  Bottom Layer w10: v1(6435,2765) 6445.75,2754.25 6445.75,2710.75 ; U3.2 6445.75,2710.75 ; R11.1 6473.15,2720 6455,2720 6445.75,2710.75
  Bottom Layer w40: Q2.1 5722.95,2612.95 v1(5730,2620)
NetQ3_1: Q3.1 U3.7 | length 198.9
  Bottom Layer w10: 6385,2895.51 6406.38,2874.13 U3.7
  Bottom Layer w25: Q3.1 6317.99,2895.51 6385,2895.51
NetQ3_2: Q3.2 Q3.4 R10.2 R12.1 T1.7 T1.8 T1.9 T1.10 | length 1867.3
  Top Layer w40: v1(6005,3190) 6250.94,2944.06 T1.10 T1.9 T1.8 T1.7
  Bottom Layer w40: v1(6005,3190) 6172.95,3190 Q3.4 ; Q3.2 Q3.4 ; R10.2 6450,3010.24 R12.1 6356.81,3010.24 Q3.4
NetQ3_3: Q3.3 R15.2 U3.6 | length 405.4
  Bottom Layer w10: R15.2 6360.28,2846.61 U3.6
  Bottom Layer w40: Q3.3 6084.45,2900.55 6120,2865 6261.34,2865 R15.2
NetR8_2: R8.2 Z1.4 | length 856
  Top Layer w50: R8.2 5815,1095 Z1.4
NetR10_1: R10.1 U3.9 | length 83.2
  Bottom Layer w10: U3.9 6445.75,2895.51 R10.1
NetR12_2: R12.2 U3.8 | length 103.9
  Bottom Layer w10: R12.2 6426.06,2913.7 U3.8
OUT: R1.1 R2.2 U1.4 | length 390.4
  Top Layer w40: U1.4 5547.76,2320.35 R1.1 5717.17,2290.24 R2.2
PGND: C4.2 C5.2 C6.2 C7.2 P1.1 P2.7 P2.9 P2.10 R8.1 R9.2 R13.1 R14.1 R15.1 R16.1 T1.12 U3.5 | length 480.3
  Top Layer w40: P2.10 5535.12,1925 R9.2 ; T1.12 v1@6744.72,3180.28
  Bottom Layer w10: R15.1 6336.42,2723.66 U3.5
  Bottom Layer w40: R14.1 6246.57,2723.66 R15.1
  other v1: 6745,3180
SEL: P2.8
Vpower: C1.2 C4.1 C5.1 C6.1 D6.K P2.1 P2.3 R11.2 T1.3 T1.4 T1.5 T1.6 U1.1 U3.1 U3.4 Z1.1 | length 5603.6
  Top Layer w20: U1.1 5672.36,2102.6 C1.2
  Top Layer w25: P2.3 5325,2175 5325,1844.88
  Top Layer w40: P2.3 P2.1 5275,2365 5499.72,2589.72 T1.6 T1.5 T1.4 T1.3 5525.94,2944.06 5450,3020 5450,3215 5485,3250 5705,3250 5995,2960 v1(5995,2630) ; 5325,1844.88 5255,1774.88 5255,1560 D6.K@5350,1465 ; C1.2 5814.76,2160.24 v1(5820,2155)
  Top Layer w50: D6.K@5350,1465 Z1.1
  Bottom Layer w10: 6380,2615.24 6406.38,2641.61 U3.4 6406.38,2740.06 6397.13,2749.31 6397.13,2780.69 6421.44,2805 6458.62,2805 ; U3.1 6513.82,2625
  Bottom Layer w15: 6458.62,2805 6510,2805
  Bottom Layer w20: C6.1 6380,2615.24
  Bottom Layer w40: Z1.1 5820,1545 v1(5820,2155) ; v1(5995,2630) 6040.24,2630 C5.1 6135,2615.24 C4.1 C6.1 ; 6510,2805 6590.24,2724.76 R11.2 6590.24,2671.17 6544.07,2625 6513.82,2625
Vreg: C2.2 C3.1 U1.5 | length 465.3
  Top Layer w40: v1(5470,2074.68) 5519.84,2074.68 U1.5
  Bottom Layer w40: v1(5470,2074.68) 5470,1969.13 C3.1 5569.76,1890.63 C2.2
pads on no net: Q2.4 T1.2 T1.11

## Polygon pours and split planes (outlines as drawn)
PGND on Bottom Layer (solid, pour order 2): 5210,3325 7005,3325 7005,1000 5210,1000 5210,3325
no net on Bottom Layer (solid, pour order 0): 5205,3325

## Keep-outs
Keep-Out Layer:
  the board outline again, w10

## Text inside footprints (layer, text, board x,y; h text height)
P2: Top Overlay "10" at 5355,1865 h50 r270; Top Overlay "9" at 5255,1865 h50 r270; Top Overlay "1" at 5255,2405 h50 r270; Top Overlay "2" at 5355,2425 h50 r270